# EAGLE board wavplayer-v3 (EAGLE 6.5.0)
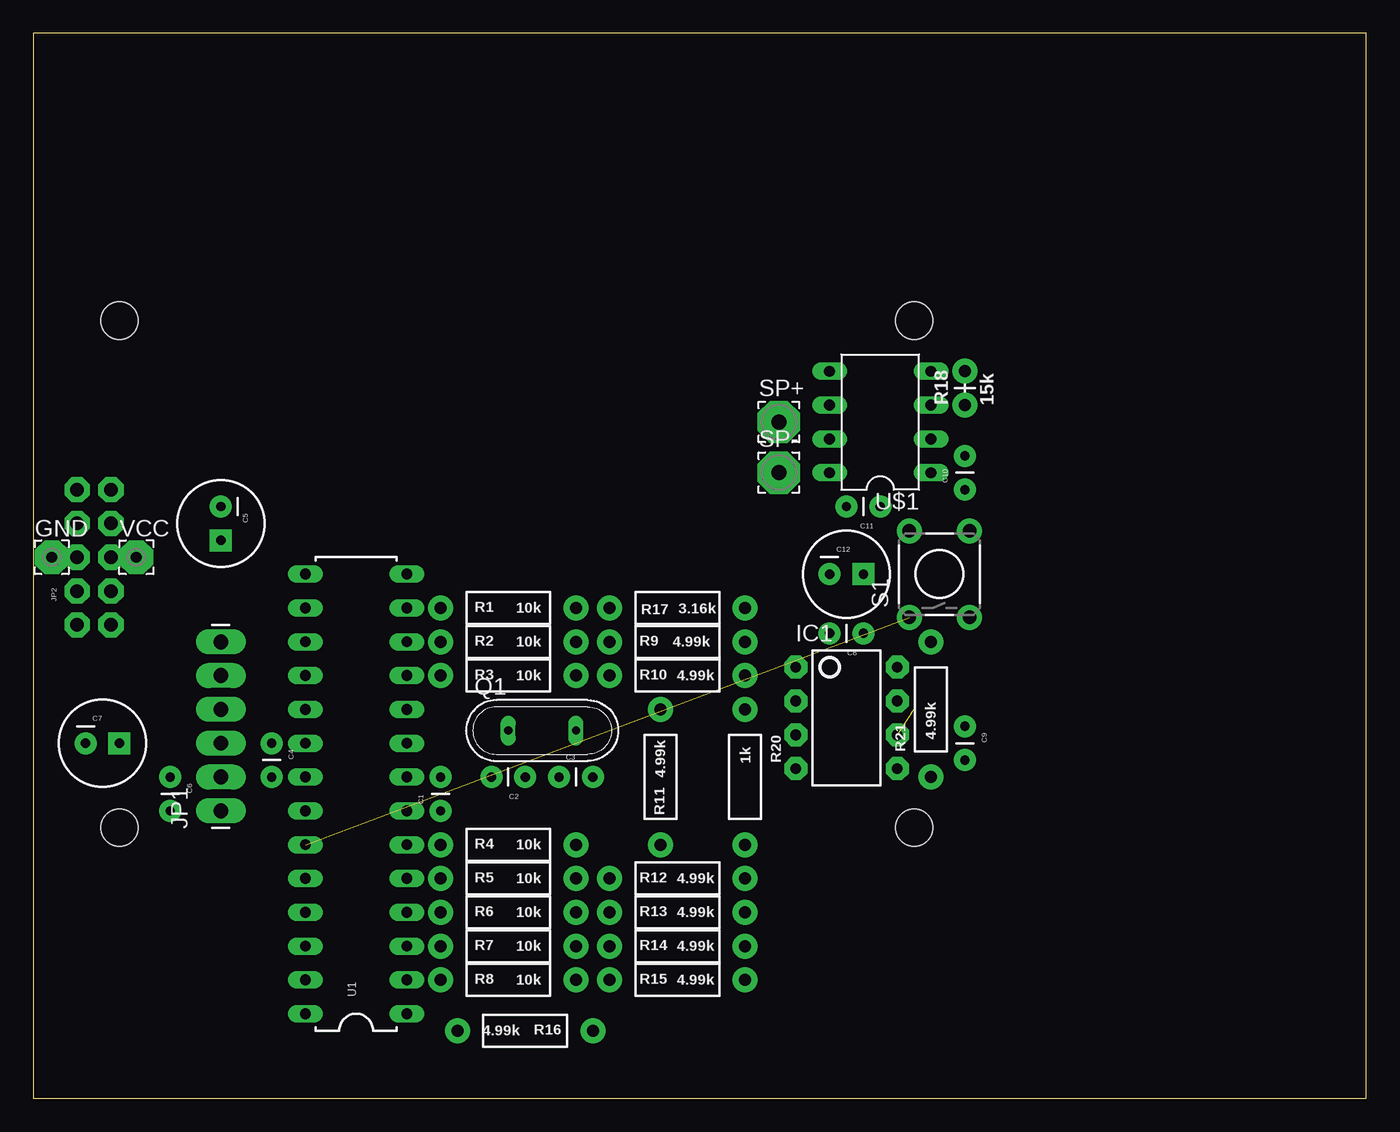
[diagram p0: board, top side]
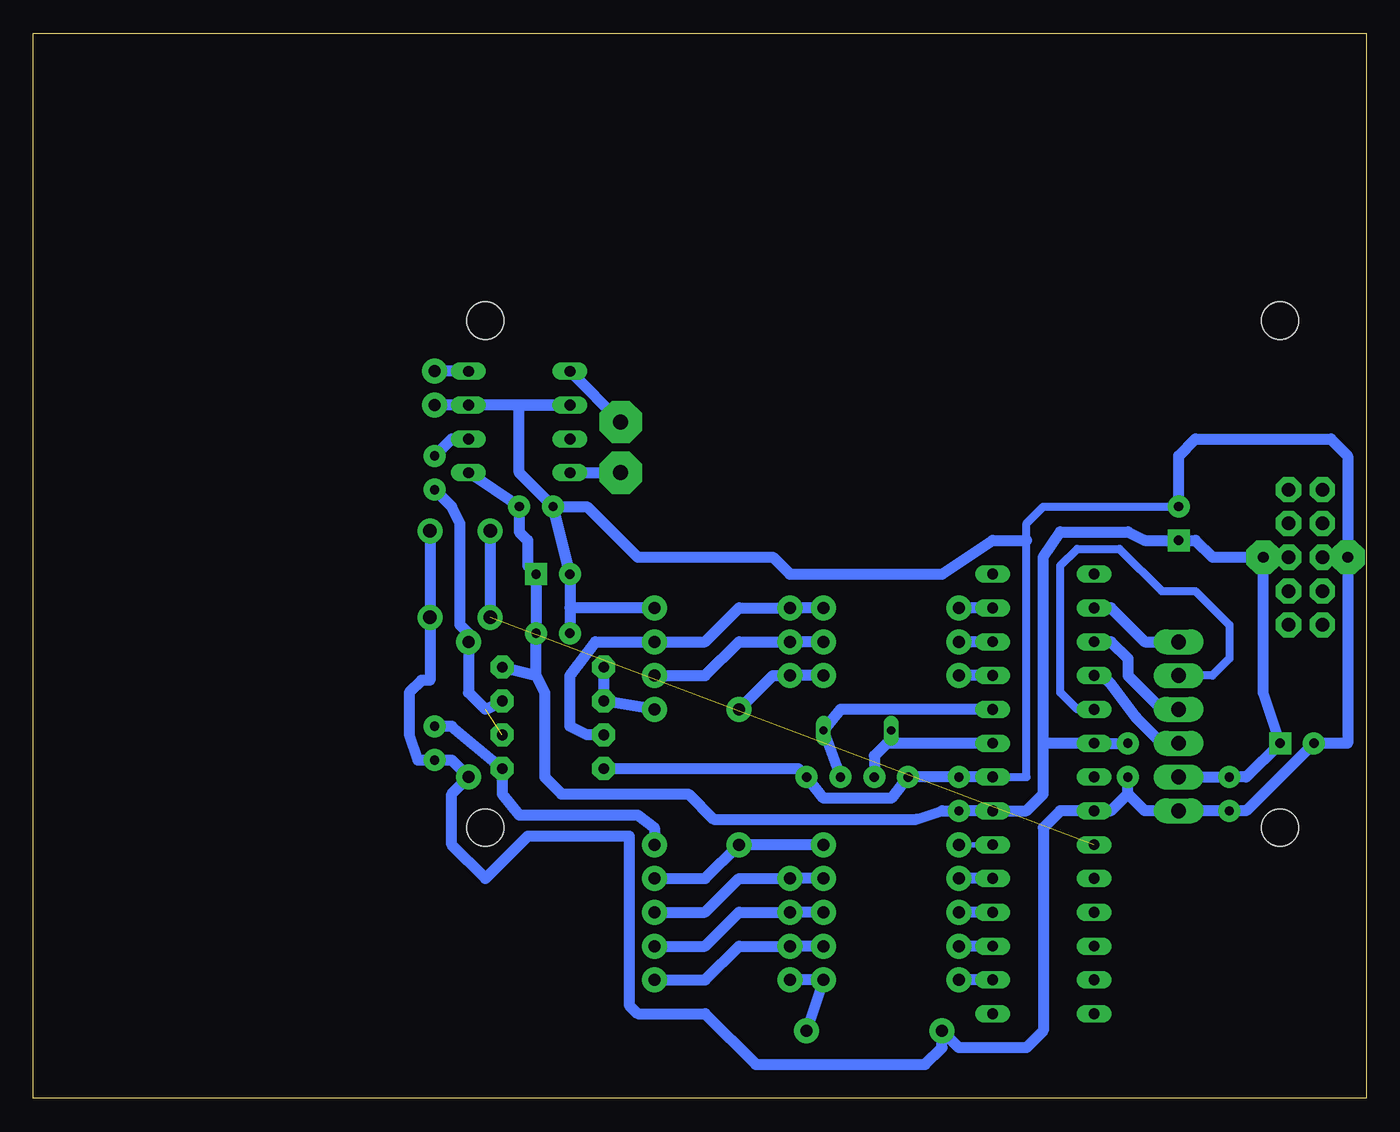
[diagram p1: board, bottom side, seen from below]

Size 100.12 x 80 mm. Coordinates in mm from the lower left corner, seen from the top.
Outline: 0,0 100.12,0 100.12,80 0,80 0,0
Copper layers (1*16): Top 0.035mm / dielectric 1.5mm / Bottom 0.035mm
Design rules "default": minimum track width 10mil, minimum drill 24mil, track to track 8mil, track to pad 8mil, pad to pad 8mil, via to via 8mil, smd to smd 8mil, copper to edge 40mil, drill to drill 8mil, minimum pad ring 10mil, minimum via ring 8mil, stop-mask expansion 4mil, vias tented up to drill 0mil, thermal gap 10mil
Holes 2.8 mm at 6.47,58.42 6.47,20.32 66.16,58.42 66.16,20.32

## Footprints (pad centres in the part's own frame; a part is rotated, then mirrored left to right if it is on the bottom)
CAP-PTH-SMALL = drill 0.7 pad 1.651: 1 0,0; 2 2.54,0
CPOL-RADIAL-100UF-25V = drill 0.7 pad 1.651 square: 1 1.27,0 | drill 0.7 pad 1.651: 2 -1.27,0
2,54/0,8 = drill 0.813 pad 2.54 octagon: 1 0,0
DIP08 = drill 0.813 pad 1.727 octagon: 1 -3.81,-3.81; 2 -1.27,-3.81; 3 1.27,-3.81; 4 3.81,-3.81; 5 3.81,3.81; 6 1.27,3.81; 7 -1.27,3.81; 8 -3.81,3.81
1X06_LONGPADS = drill 1.118 pad 1.88 long: 1 0,0; 2 2.54,0; 3 5.08,0; 4 7.62,0; 5 10.16,0; 6 12.7,0
2X5_NOSILK = drill 1.016 pad 1.88 octagon: 1 -1.27,5.08; 2 1.27,5.08; 3 -1.27,2.54; 4 1.27,2.54; 5 -1.27,0; 6 1.27,0; 7 -1.27,-2.54; 8 1.27,-2.54; 9 -1.27,-5.08; 10 1.27,-5.08
QS = drill 0.61 long: 1 -2.54,0; 2 2.54,0
AXIAL-0.4 = drill 0.9 pad 1.88: P$1 -5.08,0; P$2 5.08,0
AXIAL-0.1 = drill 0.9 pad 1.88: P$1 0,0; P$2 2.54,0
TACTILE-PTH = drill 1.016 pad 1.88: 1 -3.251,2.261; 2 3.251,2.261; 3 -3.251,-2.261; 4 3.251,-2.261
3,17/1,1 = drill 1.118 pad 3.175 octagon: 1 0,0
DIL28-3 = drill 0.813 long: 1 -16.51,-3.81; 2 -13.97,-3.81; 3 -11.43,-3.81; 4 -8.89,-3.81; 5 -6.35,-3.81; 6 -3.81,-3.81; 7 -1.27,-3.81; 8 1.27,-3.81; 9 3.81,-3.81; 10 6.35,-3.81; 11 8.89,-3.81; 12 11.43,-3.81; 13 13.97,-3.81; 14 16.51,-3.81; 15 16.51,3.81; 16 13.97,3.81; 17 11.43,3.81; 18 8.89,3.81; 19 6.35,3.81; 20 3.81,3.81; 21 1.27,3.81; 22 -1.27,3.81; 23 -3.81,3.81; 24 -6.35,3.81; 25 -8.89,3.81; 26 -11.43,3.81; 27 -13.97,3.81; 28 -16.51,3.81
DIL08 = drill 0.813 long: 1 -3.81,-3.81; 2 -1.27,-3.81; 3 1.27,-3.81; 4 3.81,-3.81; 5 3.81,3.81; 6 1.27,3.81; 7 -1.27,3.81; 8 -3.81,3.81

## Placement (x,y rotation side)
C1  100nF  [CAP-PTH-SMALL]  30.6,21.59 90 top
C2  22pF  [CAP-PTH-SMALL]  36.95,24.13 180 top
C3  22pF  [CAP-PTH-SMALL]  39.49,24.13 0 top
C4  100nF  [CAP-PTH-SMALL]  17.9,26.67 270 top
C5  10uF  [CPOL-RADIAL-100UF-25V]  14.09,43.18 270 top
C6  100nF  [CAP-PTH-SMALL]  10.28,24.13 270 top
C7  10uF  [CPOL-RADIAL-100UF-25V]  5.2,26.67 0 top
C8  100nF  [CAP-PTH-SMALL]  62.35,34.92 180 top
C9  10nF  [CAP-PTH-SMALL]  69.97,27.94 270 top
C10  470nF  [CAP-PTH-SMALL]  69.97,45.72 90 top
C11  100nF  [CAP-PTH-SMALL]  63.62,44.45 180 top
C12  220uF  [CPOL-RADIAL-100UF-25V]  61.08,39.37 0 top
GND  WIREPAD2,54/0,8  [2,54/0,8]  1.39,40.64 0 top
IC1  LM358  [DIP08]  61.08,28.57 270 top
JP1  [1X06_LONGPADS]  14.09,21.59 90 top
JP2  M05X2NO_SILK  [2X5_NOSILK]  4.56,40.64 0 top
Q1  16Mhz  [QS]  38.22,27.62 0 top
R1  10k  [AXIAL-0.4]  35.68,36.83 0 top
R2  10k  [AXIAL-0.4]  35.68,34.29 0 top
R3  10k  [AXIAL-0.4]  35.68,31.75 0 top
R4  10k  [AXIAL-0.4]  35.68,19.05 0 top
R5  10k  [AXIAL-0.4]  35.68,16.51 0 top
R6  10k  [AXIAL-0.4]  35.68,13.97 0 top
R7  10k  [AXIAL-0.4]  35.68,11.43 0 top
R8  10k  [AXIAL-0.4]  35.68,8.89 0 top
R9  4.99k  [AXIAL-0.4]  48.38,34.29 0 top
R10  4.99k  [AXIAL-0.4]  48.38,31.75 0 top
R11  4.99k  [AXIAL-0.4]  47.11,24.13 90 top
R12  4.99k  [AXIAL-0.4]  48.38,16.51 0 top
R13  4.99k  [AXIAL-0.4]  48.38,13.97 0 top
R14  4.99k  [AXIAL-0.4]  48.38,11.43 0 top
R15  4.99k  [AXIAL-0.4]  48.38,8.89 0 top
R16  4.99k  [AXIAL-0.4]  36.95,5.08 0 top
R17  3.16k  [AXIAL-0.4]  48.38,36.83 180 top
R18  15k  [AXIAL-0.1]  69.97,52.07 90 top
R20  1k  [AXIAL-0.4]  53.46,24.13 270 top
R21  4.99k  [AXIAL-0.4]  67.43,29.21 90 top
S1  [TACTILE-PTH]  68.06,39.37 90 top
SP+  WIREPAD3,17/1,1  [3,17/1,1]  56,50.8 0 top
SP-  WIREPAD3,17/1,1  [3,17/1,1]  56,46.99 0 top
U1  ATMEGA328P_PDIP  [DIL28-3]  24.25,22.86 90 top
U$1  TDA7052B  [DIL08]  63.62,50.8 90 top
VCC  WIREPAD2,54/0,8  [2,54/0,8]  7.74,40.64 0 top

## Library data of the parts
C1-C12 = SparkFun-Capacitors
GND SP+ SP- VCC = wirepad
IC1 = SparkFun-AnalogIC; PROD_ID: IC-09172
JP1 JP2 = SparkFun-Connectors
Q1 = special
R1-R17 R20 R21 = SparkFun-Passives
R18 = SparkFun-Resistors
S1 = SparkFun-Electromechanical
U1 = SparkFun-DigitalIC
U$1 = tda7052b

## Nets
B0: R8.P$1 U1.2
B1: R7.P$1 U1.3
B2: R6.P$1 U1.4
B3: R5.P$1 U1.5
B4: R4.P$1 U1.6
B5: R3.P$1 U1.11
B6: R2.P$1 U1.12
B7: R1.P$1 U1.13
CS: JP1.6 U1.16
GND: C1.2 C2.2 C3.2 C4.2 C5.2 C6.2 C7.2 C8.2 C9.2 C11.2 C12.2 GND.1 IC1.4 JP1.1 R16.P$1 R17.P$1 R18.P$1 R21.P$1 S1.3 S1.4 U1.8 U1.22 U$1.3 U$1.6
MISO: JP1.3 U1.18
MOSI: JP1.4 U1.17
N$1: C2.1 Q1.1 U1.9
N$2: C3.1 Q1.2 U1.10
N$3: R4.P$2 R11.P$1 R12.P$2
N$4: R5.P$2 R12.P$1 R13.P$2
N$5: R6.P$2 R13.P$1 R14.P$2
N$6: R3.P$2 R10.P$1 R11.P$2
N$7: R7.P$2 R14.P$1 R15.P$2
N$8: R2.P$2 R9.P$1 R10.P$2
N$9: R8.P$2 R15.P$1 R16.P$2
N$10: IC1.3 R1.P$2 R9.P$2 R17.P$2
N$11: C9.1 IC1.5 R20.P$2
N$12: C10.1 IC1.6 IC1.7 R21.P$2
N$13: IC1.1 IC1.2 R20.P$1
N$14: SP-.1 U$1.8
N$16: SP+.1 U$1.5
N$18: C10.2 U$1.2
N$19: R18.P$2 U$1.4
N$25: S1.1 S1.2 U1.23
SCK: JP1.5 U1.19
VCC: C1.1 C4.1 C5.1 C6.1 C7.1 C8.1 C11.1 C12.1 IC1.8 JP1.2 U1.7 U1.20 U$1.1 VCC.1

## Tracks (layer width: path | path; a pad name or v marks a point on that pad's centre or on a via)
B0
  Bottom 0.813: U1.2 R8.P$1
B1
  Bottom 0.813: U1.3 R7.P$1
B2
  Bottom 0.813: U1.4 R6.P$1
B3
  Bottom 0.813: U1.5 R5.P$1
B4
  Bottom 0.406: U1.6 R4.P$1
B5
  Bottom 0.813: U1.11 R3.P$1
B6
  Bottom 0.813: U1.12 R2.P$1
B7
  Bottom 0.813: U1.13 R1.P$1
CS
  Bottom 0.813: U1.16 19.17,36.83 16.63,34.29 JP1.6
GND
  Bottom 0.61: U1.8 25.52,24.13 25.52,41.91 25.52,43.18 24.25,44.45 C5.2
  Bottom 0.813: 17.9,22.86 19.17,21.59 U1.22 22.98,21.59 24.25,20.32 24.25,5.08 25.52,3.81 30.6,3.81 R16.P$1 31.87,3.81 33.14,2.54 45.84,2.54 49.65,6.35 54.73,6.35 55.36,6.99 55.36,19.68 62.98,19.68 66.16,16.51 68.7,19.05 68.7,22.86 R21.P$1 68.7,25.4 C9.2 71.24,25.4 71.87,27.3 71.87,30.48 70.96,31.39 70.33,31.39 S1.4 S1.3 | 17.9,22.86 C4.2 | 17.9,22.86 16.63,21.59 JP1.1 C6.2 9.01,21.59 C7.2 1.39,26.67 GND.1 1.39,48.26 2.66,49.53 12.82,49.53 14.09,48.26 C5.2 | U1.8 C1.2 C2.2 35.68,22.54 40.76,22.54 C3.2 42.66,24.77 IC1.4 | 59.81,36.83 C12.2 C11.2 | 59.81,36.83 C8.2 | R18.P$1 U$1.3 U$1.6 63.62,52.07 63.62,46.99 C11.2 | R17.P$1 59.81,36.83 | C11.2 58.54,44.45 54.73,40.64 44.57,40.64 43.3,39.37 31.87,39.37 28.06,41.91 25.52,41.91
MISO
  Bottom 0.813: JP1.3 15.36,26.67 17.26,28.57 19.17,31.11 19.8,31.75 U1.18
MOSI
  Bottom 0.813: U1.17 19.17,34.29 17.9,33.02 17.9,31.75 15.36,29.21 JP1.4
N$1
  Bottom 0.813: U1.9 35.68,26.67 Q1.1 35.68,26.99 36.95,25.72 C2.1
N$2
  Bottom 0.813: U1.10 39.49,29.21 Q1.2 C3.1
N$3
  Bottom 0.813: R4.P$2 R11.P$1 49.65,16.51 R12.P$2
N$4
  Bottom 0.813: R5.P$2 R12.P$1 47.11,16.51 49.65,13.97 R13.P$2
N$5
  Bottom 0.813: R6.P$2 R13.P$1 47.11,13.97 49.65,11.43 R14.P$2
N$6
  Bottom 0.813: R3.P$2 R10.P$1 44.57,31.75 R11.P$2
N$7
  Bottom 0.813: R7.P$2 R14.P$1 47.11,11.43 49.65,8.89 R15.P$2
N$8
  Bottom 0.813: R2.P$2 R9.P$1 47.11,34.29 49.65,31.75 R10.P$2
N$9
  Bottom 0.813: R15.P$1 R8.P$2 R16.P$2
N$10
  Bottom 0.813: R1.P$2 R17.P$2 47.11,36.83 49.65,34.29 R9.P$2 57.9,34.29 59.81,31.75 59.81,27.94 58.54,27.3 IC1.3
N$11
  Bottom 0.813: C9.1 68.7,27.94 IC1.5 64.89,22.86 63.62,21.27 54.73,21.27 53.46,20.32 R20.P$2
N$12  (1 unrouted)
  Bottom 0.813: IC1.7 66.16,29.21 67.43,30.48 R21.P$2 67.43,34.92 68.06,35.56 68.06,43.18 68.7,44.45 C10.1
N$13
  Bottom 0.813: IC1.1 IC1.2 R20.P$1
N$14
  Bottom 0.813: U$1.8 SP-.1
N$16
  Bottom 0.813: U$1.5 SP+.1
N$17
  cutout Top: 33.14,0 38.22,0 43.3,0.64 49.01,2.54 53.46,4.45 55.36,5.71 55.68,6.03 55.68,19.37 61.71,19.37 62.98,18.73 63.94,17.78 64.89,16.51 64.89,15.88 67.11,15.88 68.06,17.46 69.33,19.68 71.24,23.18 72.51,26.35 72.51,52.07 70.6,56.52 69.02,59.05 67.75,60.96 66.79,62.23 66.79,62.55 64.89,62.55 64.57,61.28 63.94,60.33 62.98,59.69 59.17,56.2 58.54,55.56 54.09,51.75 52.82,49.21 49.97,45.72 46.47,43.18 42.35,41.59 38.85,40.64 33.77,40.64 30.6,41.27 27.11,42.86 24.25,44.45 21.39,46.99 19.8,49.21 18.53,51.75 16.63,53.02 14.41,55.24 9.33,59.69 8.37,60.64 7.74,62.23 7.74,62.55 5.83,62.55 3.93,59.69 1.71,55.56 0.12,52.07 0.12,26.04 1.07,24.13 2.34,21.27 3.93,18.41 5.83,15.88 7.74,15.88 8.06,17.14 9.01,18.41 10.6,19.37 16.95,19.37 16.95,6.03 18.22,5.08 23.93,2.22 31.55,0.32
N$18
  Bottom 0.813: C10.2 68.7,49.53 U$1.2
N$19
  Bottom 0.813: U$1.4 R18.P$2
N$25  (1 unrouted)
  Bottom 0.813: S1.2 S1.1
SCK
  Bottom 0.61: U1.19 21.71,29.21 22.98,30.48 22.98,40.01 21.71,41.27 18.53,41.27 15.36,38.1 12.82,38.1 10.28,35.56 10.28,33.02 11.55,31.75 JP1.5
VCC
  Bottom 0.813: 24.25,26.67 24.25,22.86 25.52,21.59 U1.7 C1.1 31.87,21.59 33.77,20.95 49.01,20.95 50.92,22.86 60.44,22.86 61.71,24.13 61.71,30.48 62.35,31.75 | 24.25,26.67 24.25,40.64 22.98,42.55 17.9,42.55 16.63,41.91 C5.1 12.82,41.91 11.55,40.64 VCC.1 7.74,30.48 C7.1 9.01,24.13 C6.1 JP1.2 15.36,24.13 | 24.25,26.67 U1.20 C4.1 | 62.35,31.75 C8.1 C12.1 62.98,40.01 62.98,41.91 63.62,42.55 C11.1 U$1.1 | IC1.8 62.35,31.75

## Text on the board
Vias: TODO: / RGB led / jumpers from AVR / to separate LED board
201bmp: /Users/petri/Dropbox/Elektroniikka/eino_wavplayer/eino_pcb_150dpi.bmp